# EAGLE board R3-URC18-4-003-001 (EAGLE 8.3.2)
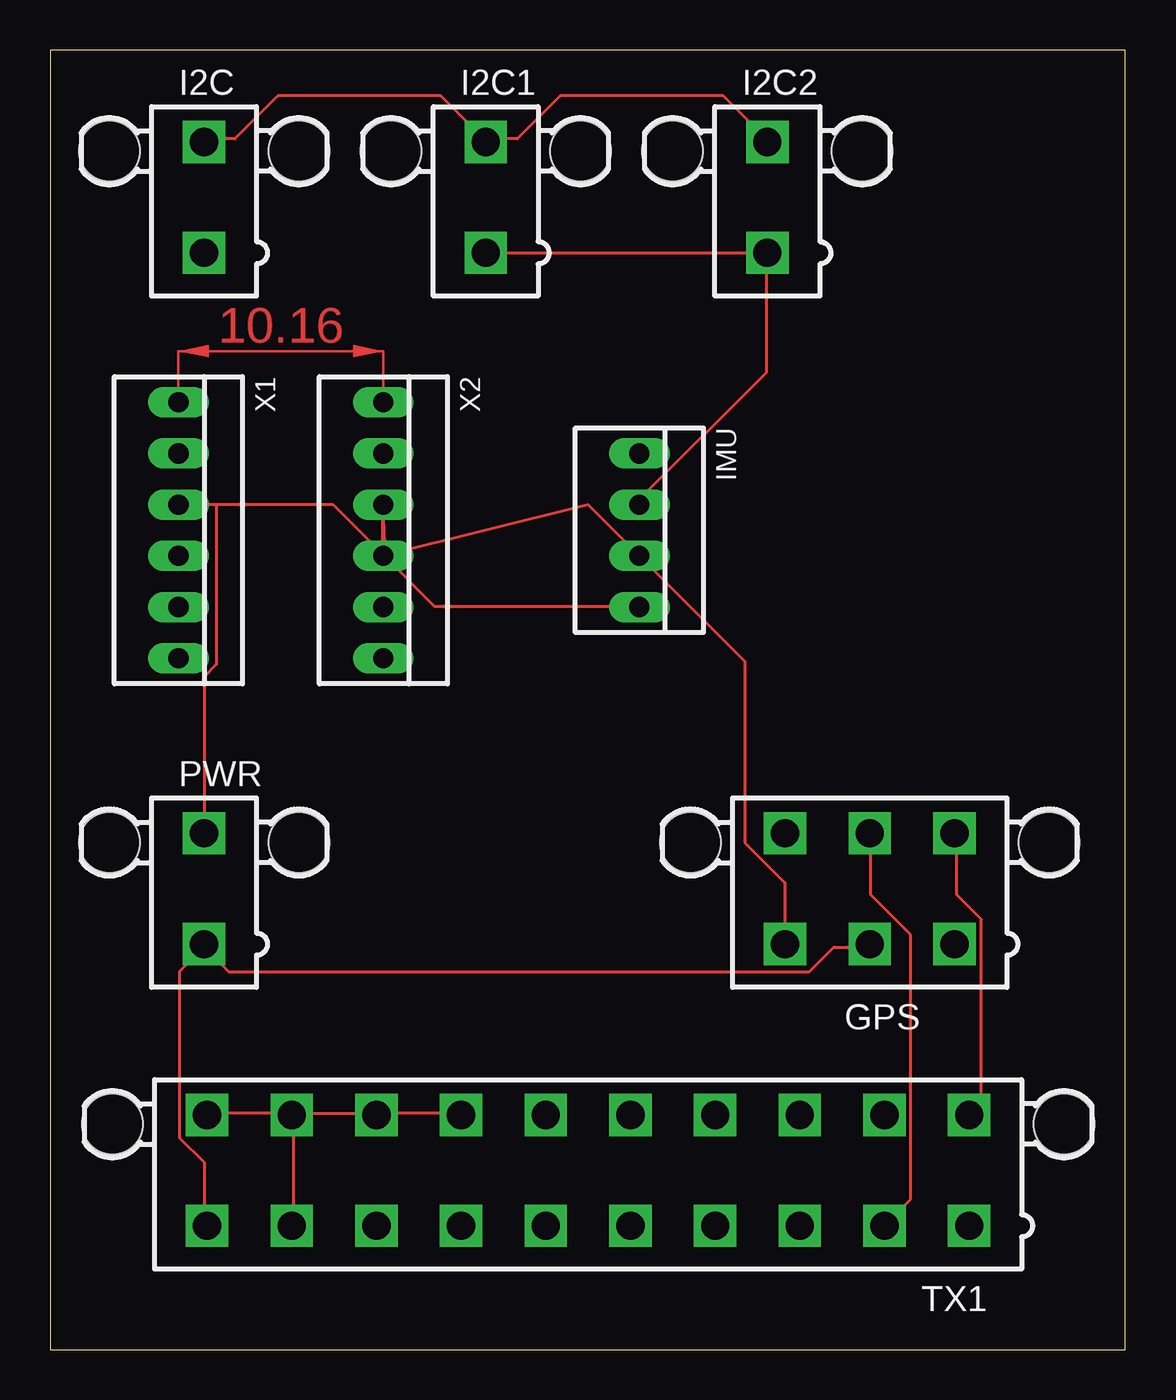
[diagram p0: board, top side]
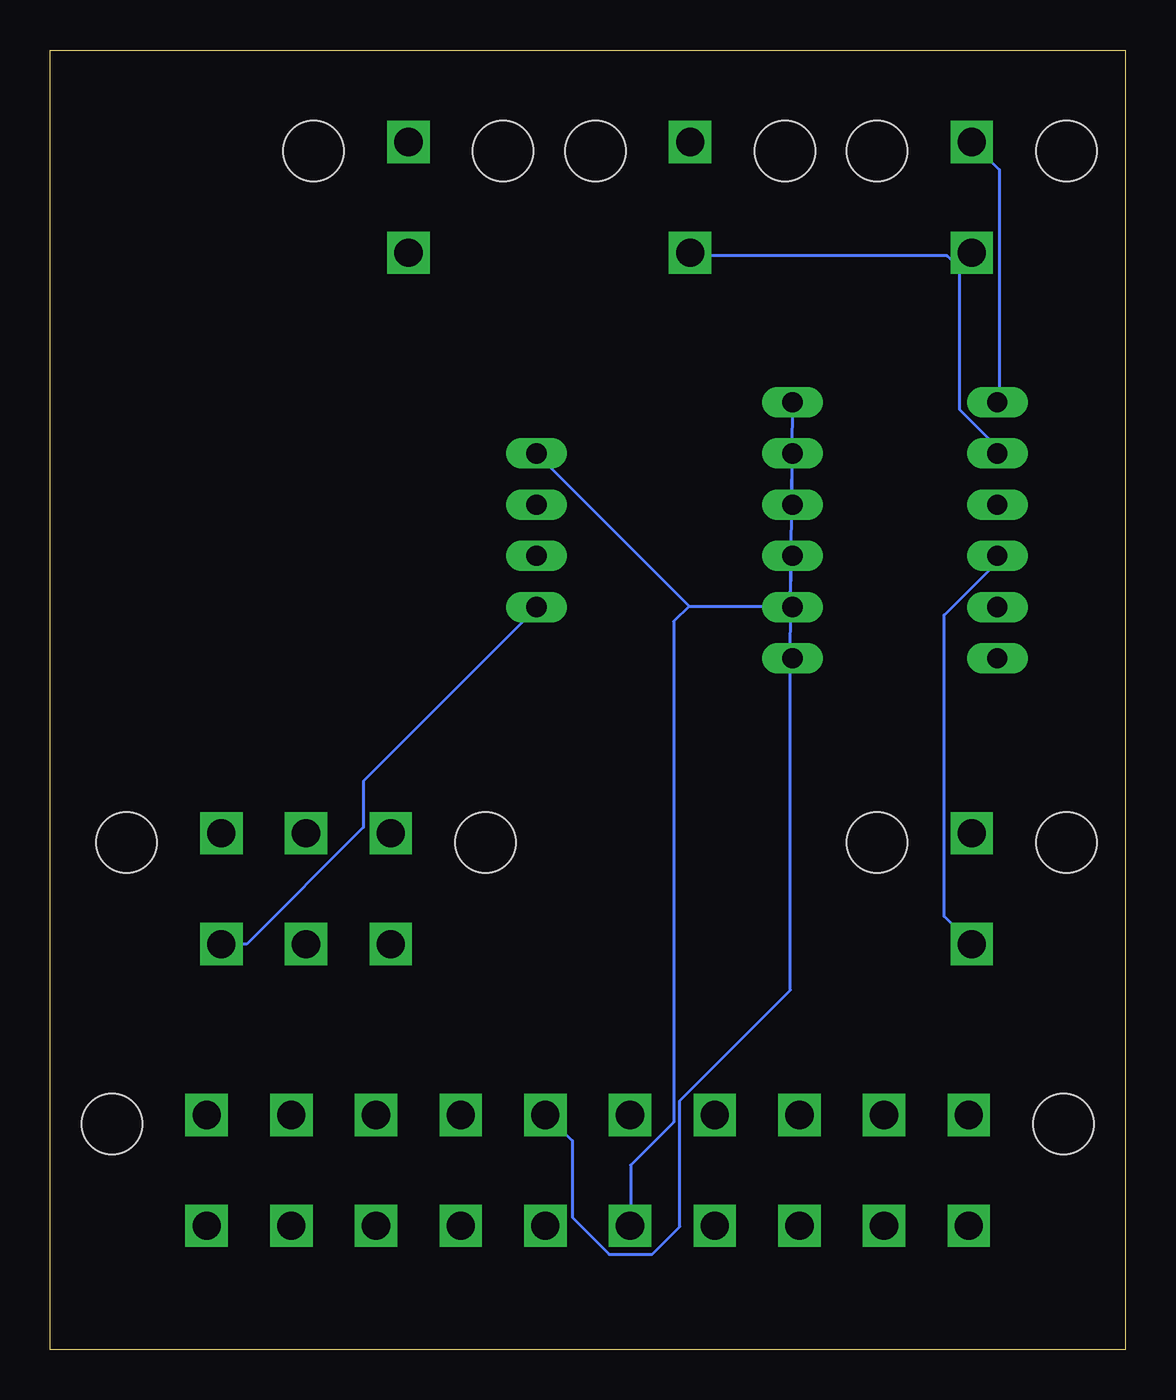
[diagram p1: board, bottom side, seen from below]

Size 53.32 x 64.44 mm. Coordinates in mm from the lower left corner, seen from the top.
Outline: 0,0 53.32,0 53.32,64.44 0,64.44 0,0
Copper layers (1*16): Top 0.035mm / dielectric 1.5mm / Bottom 0.035mm
Design rules "default": minimum track width 6mil, minimum drill 0.35mm, track to track 6mil, track to pad 6mil, pad to pad 6mil, via to via 6mil, smd to smd 6mil, copper to edge 40mil, drill to drill 6mil, minimum pad ring 10mil, minimum via ring 8mil, stop-mask expansion 4mil, vias tented up to drill 0mil, thermal gap 10mil

## Footprints (pad centres in the part's own frame; a part is rotated, then mirrored left to right if it is on the bottom)
5566-6 = drill 1.4 square: 1 4.2,-2.75; 2 0,-2.75; 3 -4.2,-2.75; 4 4.2,2.75; 5 0,2.75; 6 -4.2,2.75 | hole 3: 8.9,2.29; -8.9,2.29
5566-2 = drill 1.4 square: 1 0,-2.75; 2 0,2.75 | hole 3: 4.7,2.29; -4.7,2.29
22-23-2041 = drill 1 long: 1 -3.81,0; 2 -1.27,0; 3 1.27,0; 4 3.81,0
5566-20 = drill 1.4 square: 1 18.9,-2.75; 2 14.7,-2.75; 3 10.5,-2.75; 4 6.3,-2.75; 5 2.1,-2.75; 6 -2.1,-2.75; 7 -6.3,-2.75; 8 -10.5,-2.75; 9 -14.7,-2.75; 10 -18.9,-2.75; 11 18.9,2.75; 12 14.7,2.75; 13 10.5,2.75; 14 6.3,2.75; 15 2.1,2.75; 16 -2.1,2.75; 17 -6.3,2.75; 18 -10.5,2.75; 19 -14.7,2.75; 20 -18.9,2.75 | hole 3: 23.6,2.29; -23.6,2.29
22-23-2061 = drill 1 long: 1 -6.35,0; 2 -3.81,0; 3 -1.27,0; 4 1.27,0; 5 3.81,0; 6 6.35,0

## Placement (x,y rotation side)
GPS  5566-6  [5566-6]  40.64,22.86 0 top
I2C  5566-2  [5566-2]  7.62,57.15 0 top
I2C1  5566-2  [5566-2]  21.59,57.15 0 top
I2C2  5566-2  [5566-2]  35.56,57.15 0 top
IMU  22-23-2041  [22-23-2041]  29.21,40.64 270 top
PWR  5566-2  [5566-2]  7.62,22.86 0 top
TX1  5566-20  [5566-20]  26.67,8.89 0 top
X1  [22-23-2061]  6.35,40.64 270 top
X2  [22-23-2061]  16.51,40.64 270 top

## Library data of the parts
GPS = con-molex; MPN: 95566-61002; OC_FARNELL: unknown; OC_NEWARK: 22K8620
I2C I2C1 I2C2 PWR = con-molex; OC_FARNELL: 1822072; OC_NEWARK: unknown
IMU = con-molex; MF: MOLEX; MPN: 22-23-2041; OC_FARNELL: 1462920; OC_NEWARK: 38C0355
TX1 = con-molex; OC_FARNELL: unknown; OC_NEWARK: unknown
X1 X2 = con-molex; MF: MOLEX; MPN: 22-23-2061; OC_FARNELL: 1462922; OC_NEWARK: 27C1933

## Nets
_GND: TX1.9 TX1.17 TX1.18 TX1.19 TX1.20
GND: GPS.1 IMU.4 PWR.2 X1.3 X2.3
GOIO_2: TX1.5
GPIO_0: TX1.4
GPIO_1: TX1.13
GPIO_3: TX1.14
N$5: X1.5
N$6: GPS.6
N$7: X1.6
N$12: X2.5
N$13: X2.6
RECOVERY: TX1.7
RESET: TX1.8
RTC_BATTERY: TX1.16
SCL: I2C1.2 I2C2.2 I2C.2 X1.1
SCL_LV: IMU.1 TX1.6 X2.2
SDA: I2C1.1 I2C2.1 I2C.1 IMU.2 X1.2
SDA_LV: TX1.15 X2.1
UART_RX0: GPS.4 TX1.11
UART_RX1: TX1.12
UART_TX0: GPS.5 TX1.2
UART_TX1: TX1.3
VCC: GPS.2 PWR.1 TX1.10 X1.4
VDD: GPS.3 IMU.3 X2.4
VDD_3.3V: TX1.1

## Tracks (layer width: path | path; a pad name or v marks a point on that pad's centre or on a via)
_GND
  Top 0.152: TX1.17 20.27,11.73 16.31,11.73 TX1.18 16.15,11.73 12.04,11.73 TX1.19 | TX1.20 7.77,11.73 11.89,11.73 TX1.19 | TX1.9 12.04,6.25 12.04,11.58 TX1.19
GND
  Top 0.152: 8.23,41.91 14.02,41.91 16.46,39.47 X2.3 16.61,39.32 19.05,36.88 29.11,36.88 IMU.4 | 8.23,41.91 X1.3 | PWR.2 7.62,33.38 8.23,33.98 8.23,41.91
  Bottom 0.152: GPS.1 44.81,20.12 43.59,20.12 37.8,25.91 37.8,28.19 29.26,36.73 IMU.4
SCL
  Top 0.152: I2C2.2 35.51,60.05 33.38,62.18 25.3,62.18 23.16,60.05 21.64,60.05 I2C1.2 21.49,60.05 19.36,62.18 11.28,62.18 9.14,60.05 7.62,60.05 I2C.2
  Bottom 0.152: X1.1 6.25,47.09 6.25,58.52 I2C.2
SCL_LV
  Bottom 0.152: 21.64,36.88 16.61,36.88 X2.2 | IMU.1 21.64,36.88 | 21.64,36.88 22.4,36.12 22.4,11.28 24.54,9.14 24.54,6.25 TX1.6
SDA
  Top 0.152: IMU.2 29.26,41.91 29.26,42.22 35.51,48.46 35.51,54.25 I2C2.1 35.51,54.41 21.64,54.41 I2C1.1
  Bottom 0.152: 8.23,53.65 8.23,46.63 6.4,44.81 6.4,44.5 X1.2 | 8.23,53.65 7.62,54.25 I2C.1 8.23,53.65 | 8.23,53.65 8.84,54.25 21.49,54.25 I2C1.1
SDA_LV
  Bottom 0.152: X2.1 16.61,34.29 16.61,17.83 22.1,12.34 22.1,6.1 23.47,4.72 25.6,4.72 27.43,6.55 27.43,10.36 28.65,11.58 TX1.15
UART_RX0
  Top 0.152: GPS.4 44.96,25.6 44.96,22.55 46.18,21.34 46.18,12.19 45.72,11.73 TX1.11
UART_TX0
  Top 0.152: GPS.5 40.69,25.6 40.69,22.55 42.67,20.57 42.67,7.47 41.45,6.25 TX1.2
VCC
  Top 0.152: 7.62,19.96 6.4,18.75 6.4,10.52 7.62,9.3 7.62,6.25 TX1.10 | 7.62,19.96 8.84,18.75 37.64,18.75 38.86,19.96 40.54,19.96 GPS.2 | 7.62,19.96 PWR.1
  Bottom 0.152: X1.4 6.4,39.32 6.4,39.01 8.99,36.42 8.99,21.49 PWR.1
VDD
  Top 0.152: X2.4 26.67,41.91 IMU.3 34.44,34.14 34.44,25.15 36.42,23.16 36.42,20.12 GPS.3
(copper drawn outside any net)
  shapes: Top area x1